# Altium PCB Transceiver.PcbDoc (part 1 of 2)
Units mm, origin at the board's own origin, x right, y up, seen from the top; angles counter-clockwise.
Board outline 140 x 70 mm, 2 copper layers (Top Layer, Bottom Layer); 90 components, 122 nets, 482 pads, 145 vias.
Unrouted connection lines stored in the file: 2.
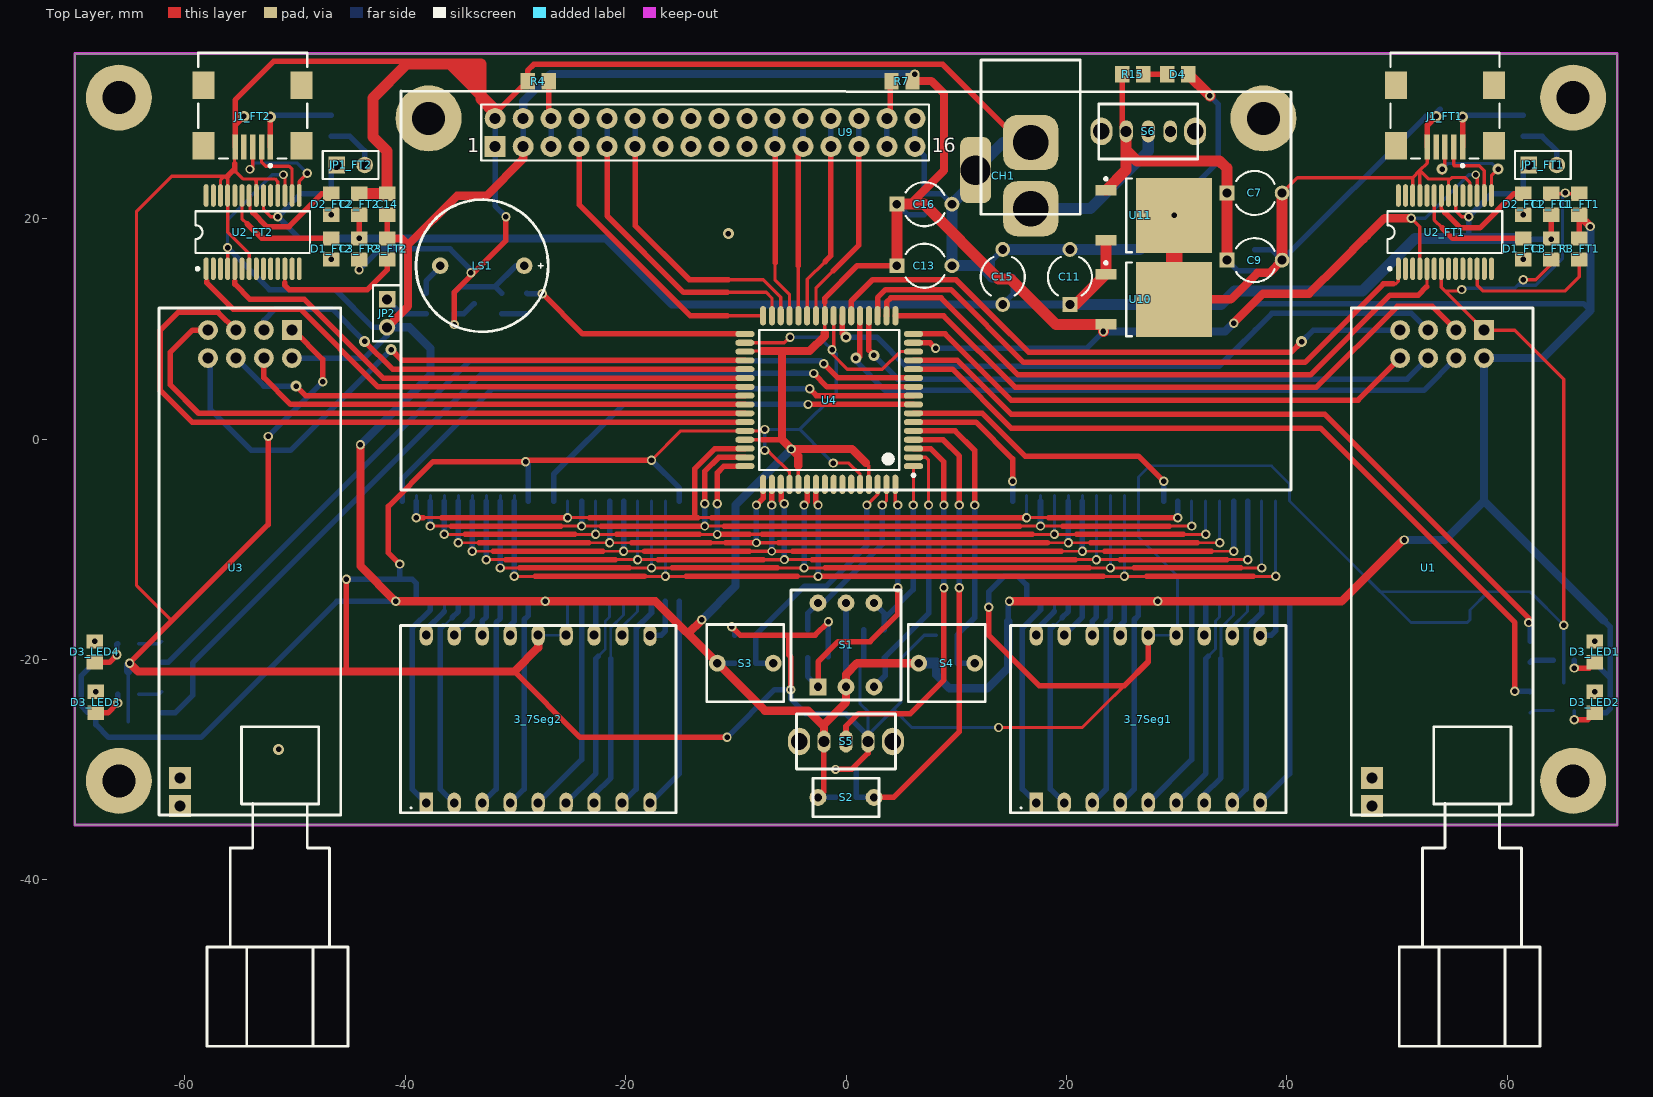
[diagram p0: Top Layer view]
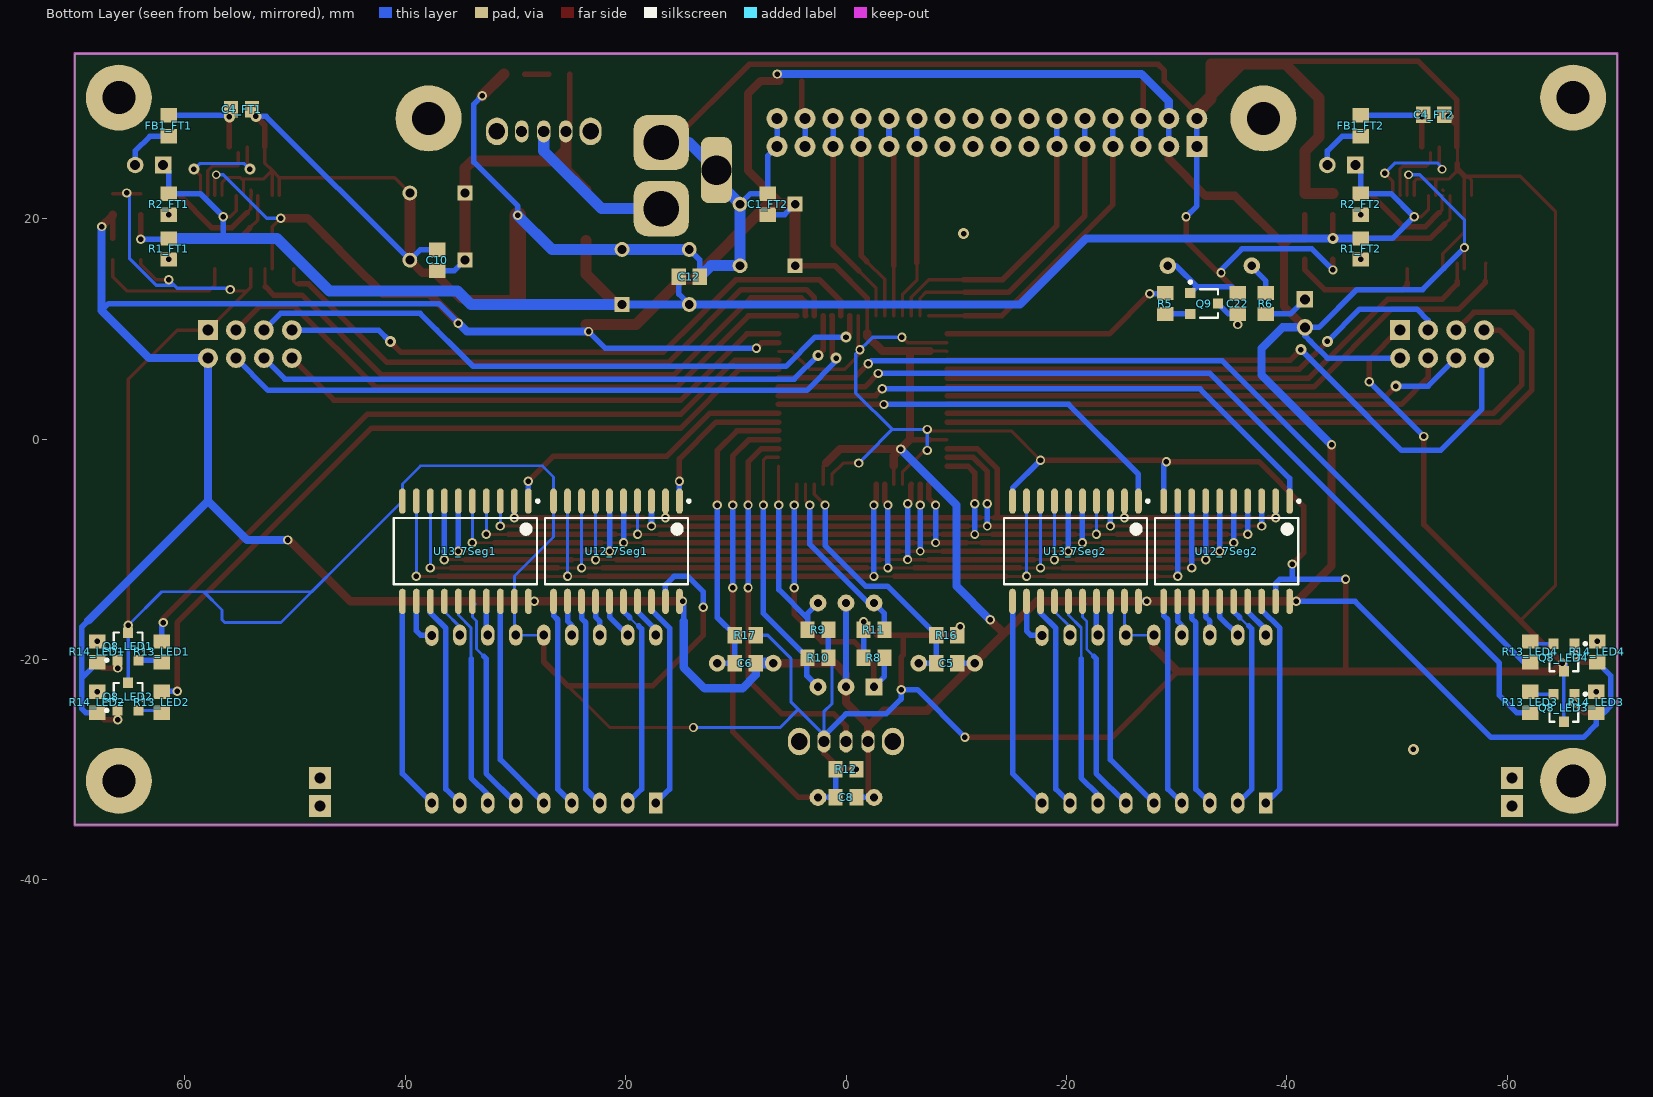
[diagram p1: Bottom Layer view, seen from below]

## Layer stack, top to bottom
Top Layer: signal copper 0.0356
Dielectric: dielectric 0.32, FR-4, Dk 4.8
Bottom Layer: signal copper 0.0356

## Board outline
-70,-35 70,-35 70,35 -70,35

## Design rules (kind name [scope] priority, off if disabled: settings)
Clearance Clearance_1 [(InPolygon)] p1: gap=0.6
Clearance [All] p2: gap=0.2
FabricationTestPointUsage TestPointUsage [All] p1: valid=0 allowmultiple=FALSE
FabricationTestpoint Testpoint [All] p1: side=3 testpointundercomponent=TRUE minsize=1.016 maxsize=2.54 preferedsize=1.524 minholesize=0 maxholesize=1.016 preferedholesize=0.813 testpointgrid=0.025 allowsidetop=TRUE allowsidebottom=TRUE usegrid=TRUE gridtolerance=0
PolygonConnect [All] p1: connectstyle=Relief reliefconductorwidth=0.254 reliefentries=4 polygonreliefangle="90 Angle" airgapwidth=0.254
RoutingVias [All] p1: holewidth=0.5 width=1 viastyle="Through Hole" minholewidth=0.5 minwidth=0.5 maxholewidth=0.5 maxwidth=1
SilkToSolderMaskClearance SilkscreenOverComponentPads [IsPad] p1: minsilkscreentomaskgap=0.254 clearancetoexposedcopper=TRUE
SolderMaskExpansion [All] p1: expansion=0.102
Width [All] p1: maxlimit=2 minlimit=0.2 preferedwidth=0.5
25 further rules are at their usual default settings.

## Classes and differential pairs
channel class FT232: FT1 FT2
component class FT2: C1_FT2 C2_FT2 C3_FT2 C4_FT2 D1_FT2 D2_FT2 FB1_FT2 J1_FT2 JP1_FT2 R1_FT2 R2_FT2 R3_FT2 U2_FT2
component class FT1: C1_FT1 C2_FT1 C3_FT1 C4_FT1 D1_FT1 D2_FT1 FB1_FT1 J1_FT1 JP1_FT1 R1_FT1 R2_FT1 R3_FT1 U2_FT1
channel class 7Seg: 7Seg1 7Seg2
component class 7Seg1: 3_7Seg1 U12_7Seg1 U13_7Seg1
component class 7Seg2: 3_7Seg2 U12_7Seg2 U13_7Seg2
component class LED1: D3_LED1 Q8_LED1 R13_LED1 R14_LED1
component class LED2: D3_LED2 Q8_LED2 R13_LED2 R14_LED2
component class LED3: D3_LED3 Q8_LED3 R13_LED3 R14_LED3
component class LED4: D3_LED4 Q8_LED4 R13_LED4 R14_LED4
component class Transceiver: C5 C6 C7 C8 C9 C10 C11 C12 C13 C14 C15 C16 C22 C? CH1 D4 JP2 LS1 Q9 R4 R5 R6 R7 R8 R9 R10 R11 R12 R15 R16 R17 S1 S2 S3 S4 S5 S6 U1 U3 U4 U9 U10 U11
net class LED[4..1]: LED1 LED2 LED3 LED4
net class RX[1..2]: RX1 RX2
net class TX[1..2]: TX1 TX2
channel class LED: LED1 LED2 LED3 LED4 LED5

## Components (designator, comment, footprint, x,y, rotation, side; value= is the part's Value field where it differs from the comment)
3_7Seg1 "7Seg Blue-CC" "7SEGMENT DUAL" 27.432,-25.4 r0 top (schematic designator 3)
3_7Seg2 "7Seg Blue-CC" "7SEGMENT DUAL" -27.94,-25.4 r0 top (schematic designator 3)
C1_FT1 "Cap_UP" 2012[0805] 66.548,21.336 r270 top (schematic designator C1)
C1_FT2 "Cap_UP" 2012[0805] 7.112,21.336 r270 bottom (schematic designator C1)
C2_FT1 "Cap_UP" 2012[0805] 64.008,21.336 r270 top (schematic designator C2)
C2_FT2 "Cap_UP" 2012[0805] -44.196,21.336 r270 top (schematic designator C2)
C3_FT1 "Cap_El" 2012[0805] 64.008,17.272 r270 top (schematic designator C3)
C3_FT2 "Cap_El" 2012[0805] -44.196,17.272 r270 top (schematic designator C3)
C4_FT1 "Cap_UP" 2012[0805] 54.864,29.972 r0 bottom (schematic designator C4)
C4_FT2 "Cap_UP" 2012[0805] -53.34,29.464 r0 bottom (schematic designator C4)
C5 "Cap_UP" 2012[0805] -9.144,-20.32 r180 bottom
C6 "Cap_UP" 2012[0805] 9.144,-20.32 r180 bottom
C7 "Cap_El" EL_M#1 37.084,22.352 r0 top
C8 "Cap_UP" 2012[0805] 0,-32.512 r180 bottom
C9 "Cap_El" EL_M#1 37.084,16.256 r0 top
C10 "Cap_UP" 2012[0805] 37.084,16.256 r270 bottom
C11 "Cap_El" EL_M#1 20.32,14.732 r90 top
C12 "Cap_UP" 2012[0805] 14.224,14.732 r0 bottom
C13 "Cap_El" EL_M#1 7.112,15.748 r0 top
C14 "Cap_UP" 2012[0805] -41.656,21.336 r270 top
C15 "Cap_El" EL_M#2 14.224,14.732 r90 top
C16 "Cap_El" EL_M#1 7.112,21.336 r0 top
C22 "Cap_UP" 2012[0805] -35.56,12.319 r270 bottom
CH1 "CHARGER" CHARGER 16.764,26.924 r180 top
D1_FT1 "Diode" 2012[0805] 61.468,17.272 r90 top (schematic designator D1)
D1_FT2 "Diode" 2012[0805] -46.736,17.272 r90 top (schematic designator D1)
D2_FT1 "Diode" 2012[0805] 61.468,21.336 r90 top (schematic designator D2)
D2_FT2 "Diode" 2012[0805] -46.736,21.336 r90 top (schematic designator D2)
D3_LED1 "LED2" 2012[0805] 67.945,-19.304 r270 top (schematic designator D3)
D3_LED2 "LED2" 2012[0805] 67.945,-23.876 r270 top (schematic designator D3)
D3_LED3 "LED2" 2012[0805] -68.072,-23.876 r270 top (schematic designator D3)
D3_LED4 "LED2" 2012[0805] -68.199,-19.304 r270 top (schematic designator D3)
D4 "Diode" 2012[0805] 30.099,33.147 r0 top
FB1_FT1 "Ferrite Beed" 2012[0805] 61.468,28.448 r90 bottom (schematic designator FB1)
FB1_FT2 "Ferrite Beed" 2012[0805] -46.736,28.448 r90 bottom (schematic designator FB1)
J1_FT1 "USB" USB_MINI 54.356,30.48 r180 top (schematic designator J1)
J1_FT2 "USB" USB_MINI -53.848,30.48 r180 top (schematic designator J1)
JP1_FT1 "JUMPER" HDR1X2 61.976,24.892 r0 top (schematic designator JP1)
JP1_FT2 "JUMPER" HDR1X2 -46.228,24.892 r0 top (schematic designator JP1)
JP2 "JUMPER" HDR1X2 -41.656,12.7 r270 top
LS1 "Buzzer" BUZZER -33.02,15.748 r180 top
Q8_LED1 "2N2222" SOT-23 65.151,-18.796 r180 bottom (schematic designator Q8)
Q8_LED2 "2N2222" SOT-23 65.151,-23.368 r180 bottom (schematic designator Q8)
Q8_LED3 "2N2222" SOT-23 -65.151,-24.384 r0 bottom (schematic designator Q8)
Q8_LED4 "2N2222" SOT-23 -65.151,-19.812 r0 bottom (schematic designator Q8)
Q9 "2N2222" SOT-23 -32.512,12.319 r270 bottom
R1_FT1 "Res" 2012[0805] 61.468,17.272 r90 bottom (schematic designator R1)
R1_FT2 "Res" 2012[0805] -46.736,17.272 r90 bottom (schematic designator R1)
R2_FT1 "Res" 2012[0805] 61.468,21.336 r90 bottom (schematic designator R2)
R2_FT2 "Res" 2012[0805] -46.736,21.336 r90 bottom (schematic designator R2)
R3_FT1 "Res" 2012[0805] 66.548,17.272 r90 top (schematic designator R3)
R3_FT2 "Res" 2012[0805] -41.656,17.272 r90 top (schematic designator R3)
R4 "Res" 2012[0805] -27.94,32.512 r180 top
R5 "Res" 2012[0805] -28.956,12.319 r90 bottom
R6 "Res" 2012[0805] -38.1,12.319 r270 bottom
R7 "Res" 2012[0805] 5.08,32.512 r0 top
R8 "Res" 2012[0805] -2.54,-19.812 r180 bottom
R9 "Res" 2012[0805] 2.54,-17.272 r0 bottom
R10 "Res" 2012[0805] 2.54,-19.812 r0 bottom
R11 "Res" 2012[0805] -2.54,-17.272 r180 bottom
R12 "Res" 2012[0805] 0,-29.972 r0 bottom
R13_LED1 "Res" 2012[0805] 62.103,-19.304 r270 bottom (schematic designator R13)
R13_LED2 "Res" 2012[0805] 62.103,-23.876 r270 bottom (schematic designator R13)
R13_LED3 "Res" 2012[0805] -62.103,-23.876 r90 bottom (schematic designator R13)
R13_LED4 "Res" 2012[0805] -62.103,-19.304 r90 bottom (schematic designator R13)
R14_LED1 "Res" 2012[0805] 67.945,-19.304 r270 bottom (schematic designator R14)
R14_LED2 "Res" 2012[0805] 67.945,-23.876 r270 bottom (schematic designator R14)
R14_LED3 "Res" 2012[0805] -68.072,-23.876 r270 bottom (schematic designator R14)
R14_LED4 "Res" 2012[0805] -68.199,-19.304 r270 bottom (schematic designator R14)
R15 "Res" 2012[0805] 26.035,33.147 r0 top
R16 "Res" 2012[0805] -9.144,-17.78 r0 bottom
R17 "Res" 2012[0805] 9.144,-17.78 r0 bottom
S1 "SW-Hex" SW-HEX 0,-18.669 r0 top
S2 "SW-SPST" PUSH-BUT-SMD 0,-32.512 r90 top
S3 "SW-SPST" PUSH-BUT -9.144,-20.32 r90 top
S4 "SW-SPST" PUSH-BUT 9.144,-20.32 r90 top
S5 "SW-SPDT" SW-SPDT 0,-27.432 r0 top
S6 "SW-SPDT" SW-SPDT 27.432,27.94 r180 top
U1 "nrf24L01" NRF24L01+PA+LNA 52.832,-11.684 r270 top
U2_FT1 "FT232RL" SSOP28 54.356,18.796 r0 top (schematic designator U2)
U2_FT2 "FT232RL" SSOP28 -53.848,18.796 r0 top (schematic designator U2)
U3 "nrf24L01" NRF24L01+PA+LNA -55.372,-11.684 r270 top
U4 "ATXmega64A3" 64A_N -1.524,3.556 r180 top
U9 "LCD" LCD 0,13.462 r90 top
U10 "LF33" D-PACK 27.94,12.7 r0 top
U11 "7805" D-PACK 27.94,20.32 r0 top
U12_7Seg1 "74ACT541SC" M20B_N 20.828,-10.16 r270 bottom (schematic designator U12)
U12_7Seg2 "74ACT541SC" M20B_N -34.544,-10.16 r270 bottom (schematic designator U12)
U13_7Seg1 "74ACT541SC" M20B_N 34.544,-10.16 r270 bottom (schematic designator U13)
U13_7Seg2 "74ACT541SC" M20B_N -20.828,-10.16 r270 bottom (schematic designator U13)

## Footprints (in the part's own frame and the unit in brackets; to place one, negate y for a bottom-side part, rotate by r counter-clockwise, add the part's x,y. Pads: shape width x height; smd on the part's side, far side on the other; paste and mask are expansions set on the pad)
"7SEGMENT DUAL" [mm]
  rect 1.2x1.9 hole 0.8: 1(-10.16,-7.62)
  oval 1.2x1.9 hole 0.8: 2(-7.62,-7.62) 3(-5.08,-7.62) 4(-2.54,-7.62) 5(0,-7.62) 6(2.54,-7.62) 7(5.08,-7.62) 8(7.62,-7.62) 9(10.16,-7.62) 10(10.16,7.595) 11(7.62,7.62) 12(5.08,7.62) 13(2.54,7.62) 14(0,7.62) 15(-2.54,7.62) 16(-5.08,7.62) 17(-7.62,7.62) 18(-10.16,7.62)
  silkscreen extent -12.5,-8.5 12.5,8.5, body extent -12.5,-8.51 12.5,8.48, height 4.8
64A_N [mm] "Thin QFP, 64-Leads, Body 14x14mm, Pitch 0.8mm, IPC Medium Density"
  oval 1.75x0.55 smd: 1(-7.65,6) 2(-7.65,5.2) 3(-7.65,4.4) 4(-7.65,3.6) 5(-7.65,2.8) 6(-7.65,2) 7(-7.65,1.2) 8(-7.65,0.4) 9(-7.65,-0.4) 10(-7.65,-1.2) 11(-7.65,-2) 12(-7.65,-2.8) 13(-7.65,-3.6) 14(-7.65,-4.4) 15(-7.65,-5.2) 16(-7.65,-6) 33(7.65,-6) 34(7.65,-5.2) 35(7.65,-4.4) 36(7.65,-3.6) 37(7.65,-2.8) 38(7.65,-2) 39(7.65,-1.2) 40(7.65,-0.4) 41(7.65,0.4) 42(7.65,1.2) 43(7.65,2) 44(7.65,2.8) 45(7.65,3.6) 46(7.65,4.4) 47(7.65,5.2) 48(7.65,6)
  oval 0.55x1.75 smd: 17(-6,-7.65) 18(-5.2,-7.65) 19(-4.4,-7.65) 20(-3.6,-7.65) 21(-2.8,-7.65) 22(-2,-7.65) 23(-1.2,-7.65) 24(-0.4,-7.65) 25(0.4,-7.65) 26(1.2,-7.65) 27(2,-7.65) 28(2.8,-7.65) 29(3.6,-7.65) 30(4.4,-7.65) 31(5.2,-7.65) 32(6,-7.65) 49(6,7.65) 50(5.2,7.65) 51(4.4,7.65) 52(3.6,7.65) 53(2.8,7.65) 54(2,7.65) 55(1.2,7.65) 56(0.4,7.65) 57(-0.4,7.65) 58(-1.2,7.65) 59(-2,7.65) 60(-2.8,7.65) 61(-3.6,7.65) 62(-4.4,7.65) 63(-5.2,7.65) 64(-6,7.65)
  silkscreen extent -7.78,-6.35 6.35,6.95, body extent -7,-7 7,7, height 1.2
2012[0805] [mm] "Chip Resistor; Body 2.0 x 1.3 mm (LxW typ)"
  rect 1.3x1.5 smd: 1(-0.95,0) 2(0.95,0)
  body extent -1.22,-0.75 1.28,0.75, height 0.5
BUZZER [mm]
  round 1.5 hole 0.8: 1(-3.81,0) 2(3.81,0)
  silkscreen extent -6,-6 6,6, body extent -5.97,-6 5.97,5.97, height 9.3
CHARGER [mm]
  rrect50% 2.8x6 hole 2.7: 1(5,2.5)
  rrect50% 5x5 hole 3.2: 2(0,0) 3(0,6)
  silkscreen extent -4.5,-7.5 4.5,6.5, body extent -4.62,-7.6 4.6,6.6, height 11.6
D-PACK [mm] "D-PAK, 3-Pads, Body 6.2x6.7mm (max), IPC Medium Density"
  rect 1.9x0.95 smd: 1(-4.35,2.28) 3(-4.35,-2.28)
  rect 6.9x6.8 smd: 4(1.85,0)
  silkscreen extent -4.47,-3.35 -2,3.43, body extent -2.5,-3.35 3.7,3.35, height 2.38
EL_M#1 [mm]
  rect 1.35x1.35 hole 0.8: 1(-2.5,0)
  round 1.35 hole 0.8: 2(2.5,0)
  silkscreen extent -1.69,-2 1.82,2, body extent -1.92,-2 1.97,2.02, height 17
EL_M#2 [mm]
  round 1.35 hole 0.8: 1(-2.5,0) 2(2.5,0)
  silkscreen extent -1.69,-2 1.82,2, body extent -1.92,-2 1.97,2.02, height 17
HDR1X2 [mm] "Connector; Header; 2 Position"
  rect 1.5x1.5 hole 0.9: 1(0,0)
  round 1.5 hole 0.9: 2(2.54,0)
  silkscreen extent -1.27,-1.27 3.81,1.27, body extent -1.38,-1.38 3.9,1.38, height 4
LCD [mm]
  round 6 hole 3: 0(15.655,37.887) 0(15.655,-37.887)
  rect 1.9x1.9 hole 1: 1(13.105,31.843)
  round 1.9 hole 1: 1(15.645,31.843) 2(13.105,29.303) 2(15.645,29.303) 3(13.105,26.763) 3(15.645,26.763) 4(13.105,24.223) 4(15.645,24.223) 5(13.105,21.683) 5(15.645,21.683) 6(13.105,19.143) 6(15.645,19.143) 7(13.105,16.603) 7(15.645,16.603) 8(13.105,14.063) 8(15.645,14.063) 9(13.105,11.523) 9(15.645,11.523) 10(13.105,8.983) 10(15.645,8.983) 11(13.105,6.443) 11(15.645,6.443) 12(13.105,3.903) 12(15.645,3.903) 13(13.105,1.363) 13(15.645,1.363) 14(13.105,-1.177) 14(15.645,-1.177) 15(13.105,-3.717) 15(15.645,-3.717) 16(13.105,-6.257) 16(15.645,-6.257)
  silkscreen extent -18.05,-40.39 18.15,40.39, body extent -18,-40.48 18.13,40.42, height 15
M20B_N [mm] "SOIC, 20-Leads, Body 12.8x7.5mm, Pitch 1.27mm, IPC Medium Density"
  oval 2.3x0.6 smd: 1(-4.55,5.715) 2(-4.55,4.445) 3(-4.55,3.175) 4(-4.55,1.905) 5(-4.55,0.635) 6(-4.55,-0.635) 7(-4.55,-1.905) 8(-4.55,-3.175) 9(-4.55,-4.445) 10(-4.55,-5.715) 11(4.55,-5.715) 12(4.55,-4.445) 13(4.55,-3.175) 14(4.55,-1.905) 15(4.55,-0.635) 16(4.55,0.635) 17(4.55,1.905) 18(4.55,3.175) 19(4.55,4.445) 20(4.55,5.715)
  silkscreen extent -4.67,-6.5 3,6.69, body extent -3.75,-6.4 3.75,6.4, height 2.6
NRF24L01+PA+LNA [mm]
  rect 1.8x1.8 hole 1: 1(-21.59,5.08)
  round 1.8 hole 1: 2(-19.05,5.08) 3(-21.59,2.54) 4(-19.05,2.54) 5(-21.59,0) 6(-19.05,0) 7(-21.59,-2.54) 8(-19.05,-2.54)
  rect 2x2 hole 1: 25(19.05,-5.08) 26(21.59,-5.08)
  silkscreen extent -23.59,-6.98 43.41,10.16
PUSH-BUT [mil]
  round 60 hole 30: 1(0,-100) 2(0,100)
  silkscreen extent -138,-138 138,138, body extent -139,-139 139,139, height 157
PUSH-BUT-SMD [mil]
  round 60 hole 30: 1(0,-100) 2(0,100)
  silkscreen extent -69,-118 69,118, body extent -69,-118 68,117, height 157
SOT-23 [mm] "SOT-23; 3 Leads; Body 3.0 x 2.6 mm, inc. leads (LxW max)"
  rect 0.9x0.95 smd: 1(-0.95,-1.25) 2(0.95,-1.25) 3(0,1.25)
  silkscreen extent -2.08,-1.37 1.3,1.25
SSOP28 [mm] "SSOP; 28 Leads; Body Width 5.3 mm; Pitch 0.65 mm"
  oval 0.45x2.05 smd: 1(-4.225,-3.325) 2(-3.575,-3.325) 3(-2.925,-3.325) 4(-2.275,-3.325) 5(-1.625,-3.325) 6(-0.975,-3.325) 7(-0.325,-3.325) 8(0.325,-3.325) 9(0.975,-3.325) 10(1.625,-3.325) 11(2.275,-3.325) 12(2.925,-3.325) 13(3.575,-3.325) 14(4.225,-3.325) 15(4.225,3.325) 16(3.575,3.325) 17(2.925,3.325) 18(2.275,3.325) 19(1.625,3.325) 20(0.975,3.325) 21(0.325,3.325) 22(-0.325,3.325) 23(-0.975,3.325) 24(-1.625,3.325) 25(-2.275,3.325) 26(-2.925,3.325) 27(-3.575,3.325) 28(-4.225,3.325)
  silkscreen extent -5.2,-3.45 5.2,1.9, body extent -5.2,-2.4 5.23,2.42, height 2
SW-HEX [mil]
  rect 60x60 hole 30: 1(-100,-150)
  round 60 hole 30: 2(0,-150) 3(100,-150) 4(100,150) 5(0,150) 6(-100,150)
  silkscreen extent -197,-197 197,197, body extent -198,-199 195,197, height 79
SW-SPDT [mm]
  oval 2x2.5 hole 1.5: 0(-4.25,0) 0(4.25,0)
  oval 1.2x2 hole 1: 1(-2,0) 2(0,0) 3(2,0)
  silkscreen extent -4.5,-2.5 4.5,2.5, body extent -4.52,-2.54 4.47,2.49, height 5
USB_MINI [mm]
  rect 0.5x2.3 smd: 1(-1.6,3.95) 2(-0.8,3.95) 3(0,3.95) 4(0.8,3.95) 5(1.6,3.95)
  rect 2x2.5 smd: 6(4.45,3.85) 7(4.45,-1.65) 8(-4.45,3.85) 9(-4.45,-1.65)
  silkscreen extent -4.95,-4.6 4.95,5.77

## Part data
3_7Seg1 3_7Seg2: library part "7Seg Blue-CC_Dual", "General Purpose Blue 7-Segment Display: CC, RH DP, Gray Surface"
C1_FT1 C1_FT2 C2_FT1 C2_FT2 C3_FT1 C3_FT2 C4_FT1 C4_FT2 C5 C6 C7 C8 C9 C10 C11 C12 C13 C14 C15 C16 C22: "Capacitor"
D1_FT1 D1_FT2 D2_FT1 D2_FT2 D4: "1 Amp General Purpose Rectifier"
D3_LED1 D3_LED2 D3_LED3 D3_LED4: library part Diode, "1 Amp General Purpose Rectifier"
J1_FT1 J1_FT2: "USB 1.1, Right Angle, Thru-Hole, A Type, Receptacle, 4 Position, Black"
LS1: "Magnetic Transducer Buzzer"
Q8_LED1 Q8_LED2 Q8_LED3 Q8_LED4 Q9: "NPN Bipolar Transistor"
R1_FT1 R1_FT2 R2_FT1 R2_FT2 R3_FT1 R3_FT2 R4 R5 R6 R7 R8 R9 R10 R11 R12 R13_LED1 R13_LED2 R13_LED3 R13_LED4 R14_LED1 R14_LED2 R14_LED3 R14_LED4 R15 R16 R17: "Semiconductor Resistor"
S2 S3 S4: "Single-Pole, Single-Throw Switch"
S5 S6: "SPDT Subminiature Toggle Switch, Right Angle Mounting, Vertical Actuation"
U9: "LCD 2X16"
U10: library part 7805
U12_7Seg1 U12_7Seg2 U13_7Seg1 U13_7Seg2: "Octal Buffer/Line Driver with 3-State Output"

## Free pads (board coordinates)
  round 6 hole 3: 19(-66,-31) 19(-66,31) 19(66,-31) 19(66,31)

## Via types
v1: diameter 0.85, hole 0.5, Top Layer to Bottom Layer, 111 vias
v2: diameter 1, hole 0.5, Top Layer to Bottom Layer, 24 vias
v3: diameter 0.8, hole 0.5, Top Layer to Bottom Layer, 10 vias

## Nets (pads, with @x,y where several pads share a name; then routed paths per layer and width w, separated by ;. In a path a pad name is that pad's centre, name@x,y a point inside that pad or via, vN(x,y) a via of type N, cw(c..) or ccw(c..) an arc to the next point about the centre after c; other vN are vias at no path point)
3.3V: C1_FT1.2 C1_FT2.2 C5.2 C6.2 C8.2 C13.1 C14.2 C16.1 JP2.2 R3_FT1.2 R3_FT2.2 R7.2 R14_LED1.2 R14_LED2.2 R14_LED3.2 R14_LED4.2 S1.2 S1.5 S2.2 S3.2 S4.2 S5.1 U1.2 U2_FT1.4 U2_FT1.17 U2_FT2.4 U2_FT2.17 U3.2 U4.15 U4.25 U4.35 U4.45 U4.53 U4.61 U9.2 U10.3 U12_7Seg1.20 U12_7Seg2.20 U13_7Seg1.20 U13_7Seg2.20 | length 855.1
  Top Layer w0.3: v1(-56.134,17.399) -56.123,17.388 U2_FT2.4@-56.123,15.471 ; v3(-51.054,24.003) -50.923,23.872 U2_FT2.17@-50.923,22.121 ; -14.348,-17.656 -14.348,-17.65 v1(-13.081,-16.383) ; U4.45@-9.174,-0.044 -6.477,-0.044 -5.798,-0.044 ; U4.35@-9.174,7.956 -9.129,8.001 -7.62,8.001 -3.302,8.001 -1.924,9.379 U4.25@-1.924,11.206 -1.924,12.446 ; -5.798,7.791 -5.798,6.35 -5.798,2.032 ; U4.53@-4.324,-4.094 -4.324,-1.518 v1(-4.953,-0.889) -5.798,-0.044 ; 1.181,-1.518 2.076,-2.413 U4.61@2.076,-4.094 ; v1(51.308,20.066) 52.07,19.304 52.07,15.482 U2_FT1.4@52.081,15.471 ; v3(57.15,24.003) 57.281,23.872 U2_FT1.17@57.281,22.121 57.281,23.491 ; -5.798,-0.044 -5.798,0.889 -5.798,2.032 ; -5.798,-0.044 -5.798,2.032
  Top Layer w0.5: v1(-44.069,-0.508) -44.069,-1.397 -44.069,-11.513 -41.443,-14.139 v1(-40.872,-14.71) -38.989,-14.71 v1(-27.283,-14.71) -17.294,-14.71 -12.446,-19.558 S3.2@-11.684,-20.32 -7.366,-24.638 -3.429,-24.638 -3.048,-25.019 -2,-26.067 ; JP2.2@-41.656,10.16 -39.751,12.065 -39.751,17.653 ; C14.2@-41.656,20.386 R3_FT2.2@-41.656,18.222 -40.32,18.222 -39.751,17.653 ; U9.2@-29.303,26.567 -29.303,25.434 -31.115,23.622 -32.639,22.098 -35.306,22.098 -39.116,18.288 ; -7.62,-0.044 -6.477,-0.044 ; -6.985,-0.044 -5.798,-0.044 ; S2.2@-2.54,-32.512 -2,-31.972 S5.1@-2,-27.432 -2,-26.067 ; -1.924,12.446 -1.924,12.808 1.016,15.748 C13.1@4.612,15.748 ; U4.15@6.126,8.756 7.627,8.756 v1(8.128,8.255) ; v1(6.24,33.147) v1@6.355,33.262 ; S4.2@6.604,-20.32 1.016,-20.32 0,-21.336 S1.2@0,-22.479 0,-23.876 -0.762,-24.638 -2,-25.876 -2,-26.067 ; v1(14.837,-14.71) 16.383,-14.71 v1(28.299,-14.71) 30.099,-14.71 44.98,-14.71 50.165,-9.525 50.546,-9.144 v1(50.673,-9.144) ; U10.3@23.368,10.42 U10.3@23.59,10.42 ; R3_FT1.2@66.548,18.222 C1_FT1.2@66.548,20.386 ; -39.751,17.653 -39.116,18.288 ; -39.751,17.653 -39.116,18.288
  Top Layer w0.75: v1(-44.069,-0.508) -44.069,-11.513 v1(-40.872,-14.71) -17.294,-14.71 S3.2@-11.684,-20.32 ; JP2.2@-41.656,10.16 -39.751,12.065 -39.751,17.653 ; R3_FT2.2@-41.656,18.222 -40.32,18.222 -39.751,17.653 ; U9.2@-29.303,26.567 -29.303,25.434 -32.639,22.098 -35.306,22.098 -39.751,17.653 ; -14.348,-17.656 -14.348,-17.65 v1(-13.081,-16.383) ; -12.446,-19.558 -7.366,-24.638 -3.429,-24.638 -2,-26.067 ; -7.62,8.001 -4.191,8.001 ; -5.842,8.001 -3.302,8.001 -1.924,9.379 -1.924,9.652 ; -5.798,0.889 -5.798,-0.044 ; -5.798,4.826 -5.798,7.918 ; -5.798,6.35 -5.798,-0.044 ; -5.798,6.477 -5.798,7.918 ; -5.715,8.001 -5.798,7.918 ; -4.324,-2.413 -4.324,-1.518 ; S5.1@-2,-27.432 -2,-26.067 ; 1.792,-2.129 1.181,-1.518 0.552,-0.889 v1(-4.953,-0.889) ; 5.842,21.336 8.89,24.384 8.89,31.369 7.747,32.512 R7.2@6.03,32.512 ; S4.2@6.604,-20.32 1.016,-20.32 0,-21.336 S1.2@0,-22.479 0,-23.876 -2,-25.876 -2,-26.067 ; v1(14.837,-14.71) 44.98,-14.71 v1@50.546,-9.144 ; v1(35.179,10.541) 37.846,13.208 42.037,13.208 44.831,16.002 ; 46.99,18.161 44.831,16.002 ; v1(51.308,20.066) 48.895,20.066 47.307,18.479 44.831,16.002 ; C1_FT1.2@66.548,20.386 66.548,20.32 v1(67.564,19.304) ; -5.798,-0.044 v1(-4.953,-0.889) ; -5.798,-0.044 -4.324,-1.518 ; v1(-4.953,-0.889) -4.324,-1.518
  Top Layer w1: C13.1@4.612,15.748 C16.1@4.612,21.336 5.842,21.336 7.065,21.336 13.859,14.541 14.922,14.541 19.044,10.42 U10.3@23.368,10.42 ; v1(23.368,9.779) 23.368,10.198 U10.3@23.59,10.42
  Bottom Layer w0.3: v1(-56.134,17.399) -56.134,19.812 ; -56.134,19.558 -56.134,19.939 -52.07,24.003 v3(-51.054,24.003) ; v1(-13.081,-16.383) -10.033,-13.335 -10.033,-5.969 ; v1(51.308,20.066) 52.578,20.066 55.88,23.368 ; 56.388,23.876 55.88,23.368 ; v3(57.15,24.003) 56.515,24.003 55.88,23.368
  Bottom Layer w0.5: R14_LED4.2@-68.199,-20.254 -69.423,-21.478 -69.423,-24.176 -68.773,-24.826 R14_LED3.2@-68.072,-24.826 -68.072,-25.908 -66.929,-27.051 -58.547,-27.051 -46.206,-14.71 v1(-40.872,-14.71) U12_7Seg2.20@-40.259,-14.71 ; v1(-56.134,17.399) -54.229,15.494 -52.324,13.589 -46.355,13.589 -42.926,10.16 JP2.2@-41.656,10.16 ; U3.2@-50.292,7.366 -43.688,7.366 -42.164,8.89 -41.656,9.398 JP2.2@-41.656,10.16 ; v1(-44.069,-0.508) -37.719,5.842 -37.719,8.255 -39.624,10.16 -40.132,10.16 JP2.2@-41.656,10.16 ; U9.2@-29.303,26.567 U9.2@-29.303,29.107 -29.303,30.674 -26.83,33.147 v1(6.24,33.147) ; v1(-27.283,-14.71) U13_7Seg2.20@-26.543,-14.71 ; S3.2@-11.684,-20.32 C5.2@-10.094,-20.32 ; S2.2@-2.54,-32.512 C8.2@-0.95,-32.512 ; S1.2@0,-22.479 S1.5@0,-14.859 ; C16.1@4.612,21.336 5.562,20.386 C1_FT2.2@7.112,20.386 ; S4.2@6.604,-20.32 C6.2@8.194,-20.32 8.194,-21.402 9.398,-22.606 12.827,-22.606 ; v1(8.128,8.255) 21.844,8.255 v1(23.368,9.779) ; 14.732,-16.51 14.732,-15.091 U12_7Seg1.20@15.113,-14.71 15.008,-14.605 14.732,-14.605 v1(14.837,-14.71) ; v1(28.299,-14.71) U13_7Seg1.20@28.829,-14.71 ; v1(35.179,10.541) 36.957,12.319 40.894,12.319 ; 38.1,12.319 38.608,12.319 40.894,12.319 ; v1(50.673,-9.144) 51.816,-9.144 54.356,-9.144 57.912,-5.588 ; 67.564,11.684 66.929,12.319 40.894,12.319 ; R14_LED2.2@67.945,-24.826 68.981,-24.826 69.342,-24.465 69.342,-21.651 ; R14_LED1.2@67.945,-20.254 69.342,-21.651 ; 68.773,-16.449 69.342,-17.018 69.342,-21.651
  Bottom Layer w0.75: v1(-44.069,-0.508) -37.719,5.842 -37.719,8.255 -39.624,10.16 JP2.2@-41.656,10.16 ; U9.2@-29.303,29.107 -29.303,30.674 -26.83,33.147 v1(6.24,33.147) ; v1(-13.081,-16.383) -10.033,-13.335 -10.033,-5.969 ; -10.033,-6.604 -10.033,-5.969 ; v1(-4.953,-0.889) -10.033,-5.969 ; C6.2@8.194,-20.32 8.194,-21.402 9.398,-22.606 12.827,-22.606 14.732,-20.701 14.732,-16.51 ; v1(23.368,9.779) 34.417,9.779 v1(35.179,10.541) ; v1(50.673,-9.144) 54.356,-9.144 57.912,-5.588 ; v1(67.564,19.304) 67.564,11.684 63.246,7.366 U1.2@57.912,7.366 57.912,-5.588 ; 68.773,-16.449 57.912,-5.588
  Bottom Layer w1: S4.2@6.604,-20.32 C6.2@8.194,-20.32
A: U4.50 U12_7Seg1.6 U12_7Seg2.6 U13_7Seg1.6 U13_7Seg2.6 | length 140.9
  Top Layer w0.254: v1(-33.909,-10.16) v1(-20.193,-10.16) -18.288,-10.16 ; 6.223,-10.16 v1(21.463,-10.16) v1(35.179,-10.16)
  Top Layer w0.3: -8.75,-10.173 -8.763,-10.16 v3(-6.731,-10.16) -4.826,-10.16
  Top Layer w0.5: -32.004,-10.16 -22.098,-10.16 ; -18.288,-10.16 -8.763,-10.16 ; v1@-6.724,-5.962 U4.50@-6.724,-4.094 ; -4.826,-10.16 6.223,-10.16 19.558,-10.16 ; 23.495,-10.16 33.147,-10.16
  Bottom Layer w0.254: U12_7Seg2.6@-33.909,-5.61 U12_7Seg2.6@-33.909,-5.102 ; v1(-20.193,-10.16) U13_7Seg2.6@-20.193,-5.61 ; v1(21.463,-10.16) U12_7Seg1.6@21.463,-5.61 U12_7Seg1.6@21.463,-5.102 ; v1(35.179,-10.16) U13_7Seg1.6@35.179,-5.61
  Bottom Layer w0.5: v1(-33.909,-10.16) U12_7Seg2.6@-33.909,-5.61 ; v1(-20.193,-10.16) U13_7Seg2.6@-20.193,-5.61 ; v3(-6.731,-10.16) v1(-6.731,-5.969) ; v1(21.463,-10.16) U12_7Seg1.6@21.463,-5.61 ; v1(35.179,-10.16) U13_7Seg1.6@35.179,-5.61
A1_7Seg1: 3_7Seg1.16 U12_7Seg1.14 | length 3.2
  Bottom Layer w0.5: 3_7Seg1.16@22.352,-17.78 22.352,-16.51 22.733,-16.129 U12_7Seg1.14@22.733,-14.71
A1_7Seg2: 3_7Seg2.16 U12_7Seg2.14 | length 3.2
  Bottom Layer w0.5: 3_7Seg2.16@-33.02,-17.78 -33.02,-16.51 -32.639,-16.129 U12_7Seg2.14@-32.639,-14.71
A2_7Seg1: 3_7Seg1.11 U13_7Seg1.14 | length 3.6
  Bottom Layer w0.254: 3_7Seg1.11@35.052,-17.78 35.052,-17.018 36.449,-15.621 U13_7Seg1.14@36.449,-14.71
A2_7Seg2: 3_7Seg2.11 U13_7Seg2.14 | length 3.6
  Bottom Layer w0.254: 3_7Seg2.11@-20.32,-17.78 -20.32,-17.018 -18.923,-15.621 U13_7Seg2.14@-18.923,-14.71
B: U4.54 U12_7Seg1.8 U12_7Seg2.8 U13_7Seg1.8 U13_7Seg2.8 | length 139.7
  Top Layer w0.254: v1(-31.369,-11.684) v1(-17.653,-11.684) -15.748,-11.684 ; 5.334,-11.684 v1(24.003,-11.684) v1(37.719,-11.684)
  Top Layer w0.3: -6.223,-11.684 v3(-3.81,-11.684) -1.905,-11.684
  Top Layer w0.5: -29.591,-11.684 -19.685,-11.684 ; -15.748,-11.684 -9.017,-11.684 -8.128,-11.684 ; -7.62,-11.684 -8.128,-11.684 ; -6.223,-11.684 -8.128,-11.684 ; v1(-3.81,-5.969) -3.524,-5.683 U4.54@-3.524,-4.094 ; -1.905,-11.684 2.413,-11.684 ; 1.651,-11.684 2.413,-11.684 ; 22.098,-11.684 5.334,-11.684 2.413,-11.684 ; 26.162,-11.684 35.814,-11.684
  Bottom Layer w0.254: U12_7Seg2.8@-31.369,-5.61 U12_7Seg2.8@-31.369,-5.102 ; v1(-17.653,-11.684) U13_7Seg2.8@-17.653,-5.61 ; v1(24.003,-11.684) U12_7Seg1.8@24.003,-5.61 U12_7Seg1.8@24.003,-5.102 ; v1(37.719,-11.684) U13_7Seg1.8@37.719,-5.61
  Bottom Layer w0.5: v1(-31.369,-11.684) U12_7Seg2.8@-31.369,-5.61 ; v3(-3.81,-11.684) v1(-3.81,-5.969)
B1_7Seg1: 3_7Seg1.15 U12_7Seg1.12 | length 3.2
  Bottom Layer w0.5: 3_7Seg1.15@24.892,-17.78 24.892,-16.891 25.273,-16.51 U12_7Seg1.12@25.273,-14.71
B1_7Seg2: 3_7Seg2.15 U12_7Seg2.12 | length 3.2
  Bottom Layer w0.5: 3_7Seg2.15@-30.48,-17.78 -30.48,-16.891 -30.099,-16.51 U12_7Seg2.12@-30.099,-14.71
B2_7Seg1: 3_7Seg1.10 U13_7Seg1.12 | length 4.3
  Bottom Layer w0.5: 3_7Seg1.10@37.592,-17.805 38.583,-17.805 38.989,-17.399 U13_7Seg1.12@38.989,-14.71
B2_7Seg2: 3_7Seg2.10 U13_7Seg2.12 | length 4.3
  Bottom Layer w0.5: 3_7Seg2.10@-17.78,-17.805 -16.789,-17.805 -16.383,-17.399 U13_7Seg2.12@-16.383,-14.71
BUZ: R5.2 U4.33 | length 21.3
  Top Layer w0.5: v1(-27.559,13.208) -23.907,9.556 U4.33@-9.174,9.556
  Bottom Layer w0.5: R5.2@-28.956,13.269 -28.895,13.208 v1(-27.559,13.208)
C: U4.51 U12_7Seg1.7 U12_7Seg2.7 U13_7Seg1.7 U13_7Seg2.7 | length 145.2
  Top Layer w0.2: -7.493,-10.922 -6.985,-10.922 ; v3(-5.588,-10.922) -6.985,-10.922 ; -3.048,-10.922 -6.985,-10.922
  Top Layer w0.254: v1(-32.639,-10.922) v1(-18.923,-10.922) -17.018,-10.922 ; 4.953,-10.922 v1(22.733,-10.922) v1(36.449,-10.922)
  Top Layer w0.3: -7.747,-10.922 -7.734,-10.935 -5.601,-10.935 -5.575,-10.909 -3.061,-10.909 -3.048,-10.922
  Top Layer w0.5: -30.861,-10.922 -20.955,-10.922 ; -17.018,-10.922 -9.398,-10.922 -7.747,-10.922 -7.493,-10.922 ; U4.51@-5.924,-4.094 -5.856,-4.162 -5.856,-5.574 v1(-5.588,-5.842) ; -3.048,-10.922 -1.905,-10.922 -1.524,-10.922 -1.27,-10.922 1.778,-10.922 4.953,-10.922 20.828,-10.922 ; 24.892,-10.922 34.544,-10.922
  Bottom Layer w0.254: U12_7Seg2.7@-32.639,-5.61 U12_7Seg2.7@-32.639,-5.102 ; v1(-18.923,-10.922) U13_7Seg2.7@-18.923,-5.61 ; v1(22.733,-10.922) U12_7Seg1.7@22.733,-5.61 U12_7Seg1.7@22.733,-5.102 ; v1(36.449,-10.922) U13_7Seg1.7@36.449,-5.61
  Bottom Layer w0.5: v1(-32.639,-10.922) U12_7Seg2.7@-32.639,-5.61 ; v3(-5.588,-10.922) v1(-5.588,-5.842) ; v1(36.449,-10.922) U13_7Seg1.7@36.449,-5.61
C1_7Seg1: 3_7Seg1.3 U12_7Seg1.13 | length 19
  Bottom Layer w0.5: 3_7Seg1.3@22.352,-33.02 23.622,-31.75 23.622,-16.637 24.003,-16.256 U12_7Seg1.13@24.003,-14.71
C1_7Seg2: 3_7Seg2.3 U12_7Seg2.13 | length 19
  Bottom Layer w0.5: 3_7Seg2.3@-33.02,-33.02 -31.75,-31.75 -31.75,-16.637 -31.369,-16.256 U12_7Seg2.13@-31.369,-14.71
C2_7Seg1: 3_7Seg1.8 U13_7Seg1.13 | length 19.4
  Bottom Layer w0.5: 3_7Seg1.8@35.052,-33.02 36.322,-31.75 36.322,-17.152 37.719,-15.755 U13_7Seg1.13@37.719,-14.71
C2_7Seg2: 3_7Seg2.8 U13_7Seg2.13 | length 19.4
  Bottom Layer w0.5: 3_7Seg2.8@-20.32,-33.02 -19.05,-31.75 -19.05,-17.152 -17.653,-15.755 U13_7Seg2.13@-17.653,-14.71
CE1: U1.3 U4.17 | length 57.5
  Top Layer w0.5: U4.17@4.476,11.206 8.86,11.206 15.367,4.699 42.672,4.699 50.038,12.065 53.213,12.065 U1.3@55.372,9.906
CE2: U3.3 U4.37 | length 47.2
  Top Layer w0.5: v2(-43.688,8.89) -41.154,6.356 U4.37@-9.174,6.356
  Bottom Layer w0.5: U3.3@-52.832,9.906 -52.832,10.795 -51.816,11.811 -46.609,11.811 v2(-43.688,8.89)
CSN1: U1.6 U4.20 | length 55.8
  Top Layer w0.5: U4.20@2.076,11.206 2.076,8.084 v2(2.54,7.62)
  Bottom Layer w0.5: v2(2.54,7.62) 4.699,5.461 50.927,5.461 U1.6@52.832,7.366
CSN2: U3.6 U4.40 | length 47.6
  Top Layer w0.5: v2(-49.911,4.826) -49.041,3.956 U4.40@-9.174,3.956
  Bottom Layer w0.5: U3.6@-55.372,7.366 -52.832,4.826 v2(-49.911,4.826)
D: U4.48 U12_7Seg1.4 U12_7Seg2.4 U13_7Seg1.4 U13_7Seg2.4 | length 119.1
  Top Layer w0.254: v1(-36.449,-8.636) v1(-22.733,-8.636) -20.828,-8.636 ; 7.874,-8.636 v1(18.923,-8.636) v1(32.639,-8.636)
  Top Layer w0.3: -13.335,-8.636 -13.322,-8.649 -11.697,-8.649 v3(-11.684,-8.636) ; -8.763,-8.636 -7.62,-8.636
  Top Layer w0.5: -34.544,-8.636 -24.638,-8.636 ; -20.828,-8.636 -13.335,-8.636 ; v3(-11.684,-8.636) -8.763,-8.636 ; v1(-11.684,-5.842) -11.684,-3.048 -11.08,-2.444 U4.48@-9.174,-2.444 ; -7.62,-8.636 7.874,-8.636 16.891,-8.636 ; 20.955,-8.636 30.607,-8.636
  Bottom Layer w0.254: U12_7Seg2.4@-36.449,-5.61 U12_7Seg2.4@-36.449,-5.102 ; v1(-22.733,-8.636) U13_7Seg2.4@-22.733,-5.61 ; v1(18.923,-8.636) U12_7Seg1.4@18.923,-5.61 U12_7Seg1.4@18.923,-5.102 ; v1(32.639,-8.636) U13_7Seg1.4@32.639,-5.61
  Bottom Layer w0.5: v1(-36.449,-8.636) U12_7Seg2.4@-36.449,-5.61 ; v3(-11.684,-8.636) v1(-11.684,-5.842)
D1_7Seg1: 3_7Seg1.2 U12_7Seg1.16 | length 19.5
  Bottom Layer w0.2: 18.843,-16.971 19.62,-16.194
  Bottom Layer w0.5: 18.815,-16.942 18.542,-17.215 18.542,-31.75 3_7Seg1.2@19.812,-33.02 ; 19.62,-16.194 20.193,-15.621 U12_7Seg1.16@20.193,-14.71
D1_7Seg2: 3_7Seg2.2 U12_7Seg2.16 | length 19.5
  Bottom Layer w0.2: -36.529,-16.971 -35.752,-16.194
  Bottom Layer w0.5: -36.557,-16.942 -36.83,-17.215 -36.83,-31.75 3_7Seg2.2@-35.56,-33.02 ; -35.752,-16.194 -35.179,-15.621 U12_7Seg2.16@-35.179,-14.71
D2_7Seg1: 3_7Seg1.6 U13_7Seg1.16 | length 20.3
  Bottom Layer w0.254: 32.893,-19.685 33.528,-19.05 33.528,-16.51 33.909,-16.129 U13_7Seg1.16@33.909,-14.71 U13_7Seg1.16@33.655,-14.964
  Bottom Layer w0.5: 3_7Seg1.6@29.972,-33.02 32.673,-30.319 32.673,-19.905 32.893,-19.685
D2_7Seg2: 3_7Seg2.6 U13_7Seg2.16 | length 20.3
  Bottom Layer w0.254: -22.479,-19.685 -21.844,-19.05 -21.844,-16.51 -21.463,-16.129 U13_7Seg2.16@-21.463,-14.71 U13_7Seg2.16@-21.717,-14.964
  Bottom Layer w0.5: 3_7Seg2.6@-25.4,-33.02 -22.699,-30.319 -22.699,-19.905 -22.479,-19.685
DM_FT1: J1_FT1.2 U2_FT1.16 | length 7.8
  Top Layer w0.3: J1_FT1.2@55.156,26.022 55.156,24.892 55.218,24.83 57.466,24.83 57.931,24.365 U2_FT1.16@57.931,22.121 ; U2_FT1.16@57.912,22.14 U2_FT1.16@57.931,22.121 ; 57.931,23.548 U2_FT1.16@57.931,22.121
DM_FT2: J1_FT2.2 U2_FT2.16 | length 6.9
  Top Layer w0.3: J1_FT2.2@-53.048,26.022 -53.048,25.146 -52.667,24.765 -51.308,24.765 ; -51.689,24.765 -50.546,24.765 -50.273,24.492 -50.273,23.495 ; U2_FT2.16@-50.292,22.14 U2_FT2.16@-50.273,22.121 -50.273,23.495 ; -50.273,23.73 -50.273,23.495
DP: U4.55 U12_7Seg1.9 U12_7Seg2.9 U13_7Seg1.9 U13_7Seg2.9 | length 147.4
  Top Layer w0.2: -5.207,-12.446 v3(-2.54,-12.446)
  Top Layer w0.254: v1(-30.099,-12.446) v1(-16.383,-12.446) -12.7,-12.446 ; 5.969,-12.446 v1(25.273,-12.446) v1(38.989,-12.446)
  Top Layer w0.5: -28.194,-12.446 -18.288,-12.446 ; -14.478,-12.446 -12.7,-12.446 -8.255,-12.446 -6.858,-12.446 ; -5.207,-12.446 -6.858,-12.446 ; -4.445,-12.446 -6.858,-12.446 ; U4.55@-2.724,-4.094 -2.724,-5.785 v1(-2.54,-5.969) ; v3(-2.54,-12.446) -1.524,-12.446 ; -1.905,-12.446 -1.524,-12.446 ; 23.368,-12.446 5.969,-12.446 3.429,-12.446 -1.524,-12.446 ; 27.305,-12.446 36.957,-12.446
  Bottom Layer w0.254: U12_7Seg2.9@-30.099,-5.61 U12_7Seg2.9@-30.099,-5.102 ; v1(-16.383,-12.446) U13_7Seg2.9@-16.383,-5.61 ; v1(25.273,-12.446) U12_7Seg1.9@25.273,-5.61 U12_7Seg1.9@25.273,-5.102 ; v1(38.989,-12.446) U13_7Seg1.9@38.989,-5.61
  Bottom Layer w0.5: v1(-30.099,-12.446) U12_7Seg2.9@-30.099,-5.61 ; v3(-2.54,-12.446) v1(-2.54,-5.969)
DP1_7Seg1: 3_7Seg1.4 U12_7Seg1.11 | length 19
  Bottom Layer w0.5: 3_7Seg1.4@24.892,-33.02 26.162,-31.75 26.162,-16.383 26.543,-16.002 U12_7Seg1.11@26.543,-14.71
DP1_7Seg2: 3_7Seg2.4 U12_7Seg2.11 | length 19
  Bottom Layer w0.5: 3_7Seg2.4@-30.48,-33.02 -29.21,-31.75 -29.21,-16.383 -28.829,-16.002 U12_7Seg2.11@-28.829,-14.71
DP2_7Seg1: 3_7Seg1.9 U13_7Seg1.11 | length 19.4
  Bottom Layer w0.5: 3_7Seg1.9@37.592,-33.02 40.259,-30.353 U13_7Seg1.11@40.259,-14.71
DP2_7Seg2: 3_7Seg2.9 U13_7Seg2.11 | length 19.4
  Bottom Layer w0.5: 3_7Seg2.9@-17.78,-33.02 -15.113,-30.353 U13_7Seg2.11@-15.113,-14.71
DP_FT1: J1_FT1.3 U2_FT1.15 | length 12.6
  Top Layer w0.3: v2@54.102,24.13 v2@54.102,24.257 ; v2(54.102,24.511) 54.356,24.765 J1_FT1.3@54.356,26.53 J1_FT1.3@54.356,26.022 ; U2_FT1.15@58.581,22.121 58.581,23.495 ; v2(59.182,24.511) 58.581,23.91 ; 58.581,23.495 58.581,23.91 ; 58.581,23.495 58.581,23.91
  Bottom Layer w0.3: v2(54.102,24.511) 54.61,25.019 56.642,25.019 ; 57.912,25.019 56.642,25.019 ; v2(59.182,24.511) 58.674,25.019 56.642,25.019
DP_FT2: J1_FT2.3 U2_FT2.15 | length 11.2
  Top Layer w0.3: v3@-54.102,24.257 -53.848,24.511 J1_FT2.3@-53.848,26.53 J1_FT2.3@-53.848,26.022 ; U2_FT2.15@-49.623,22.121 -49.623,23.402 v1(-48.895,24.13)
  Bottom Layer w0.3: v1(-48.895,24.13) -49.839,25.074 -51.308,25.074 -53.666,25.074 v3@-54.102,24.638 ; v3@-54.102,24.638 v3(-54.102,24.511) v3@-54.102,24.638